# EAGLE board miniCARL-mk2 (EAGLE 6.5.0)
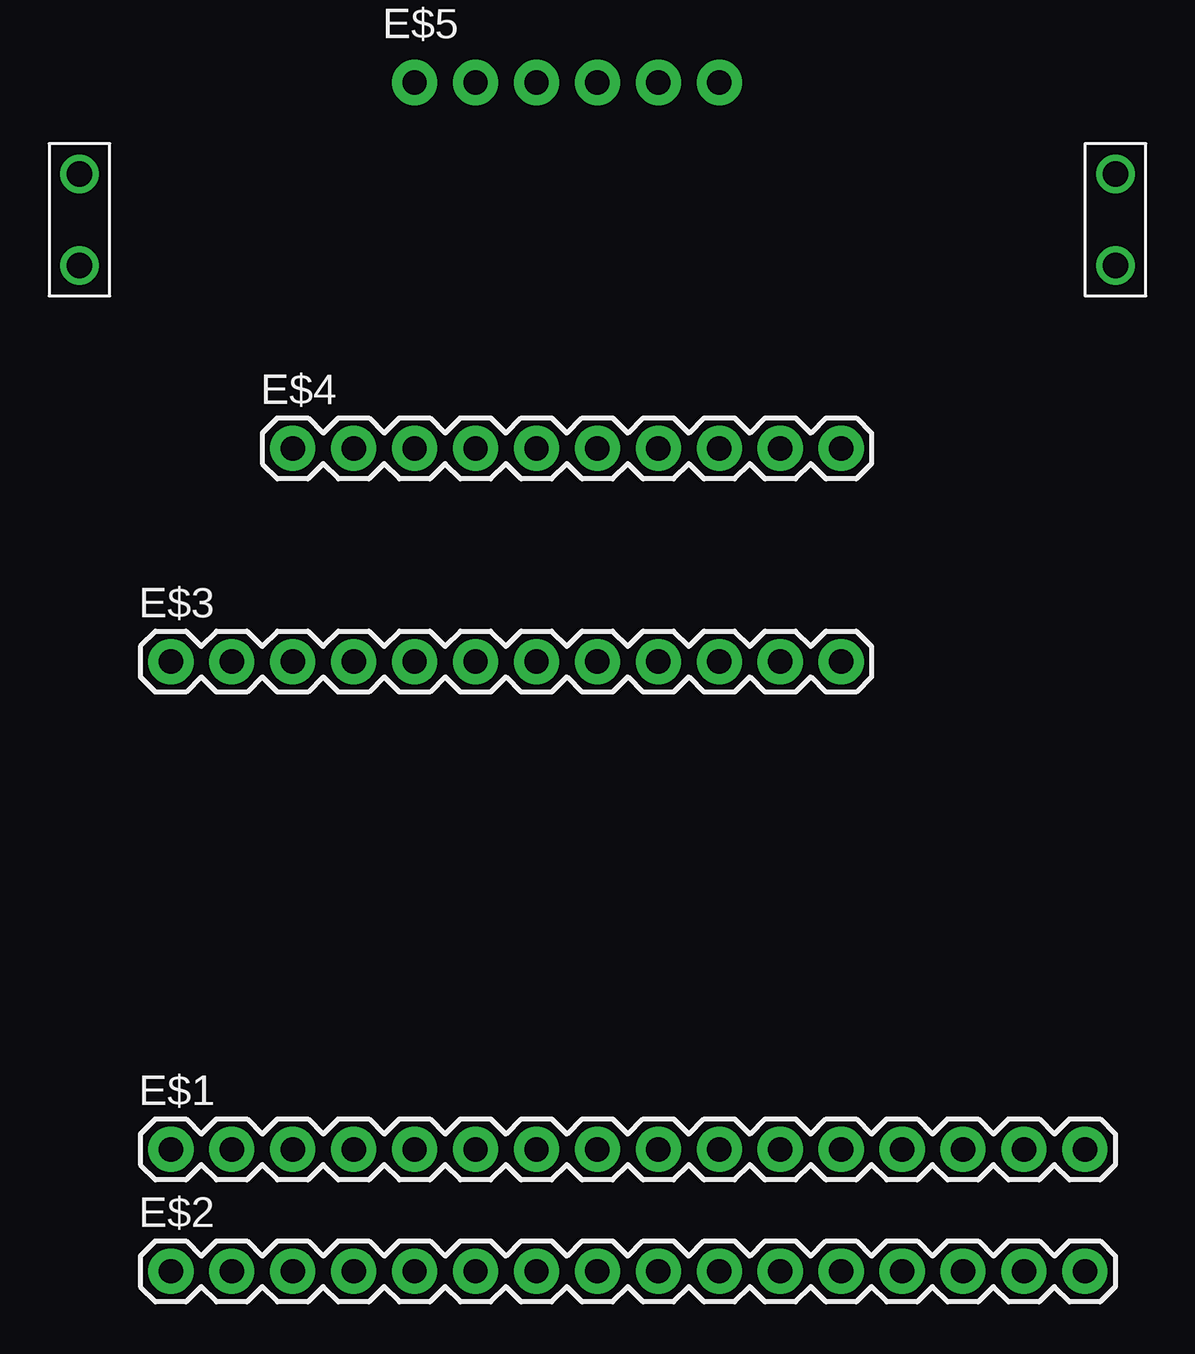
[diagram p0: board, top side]
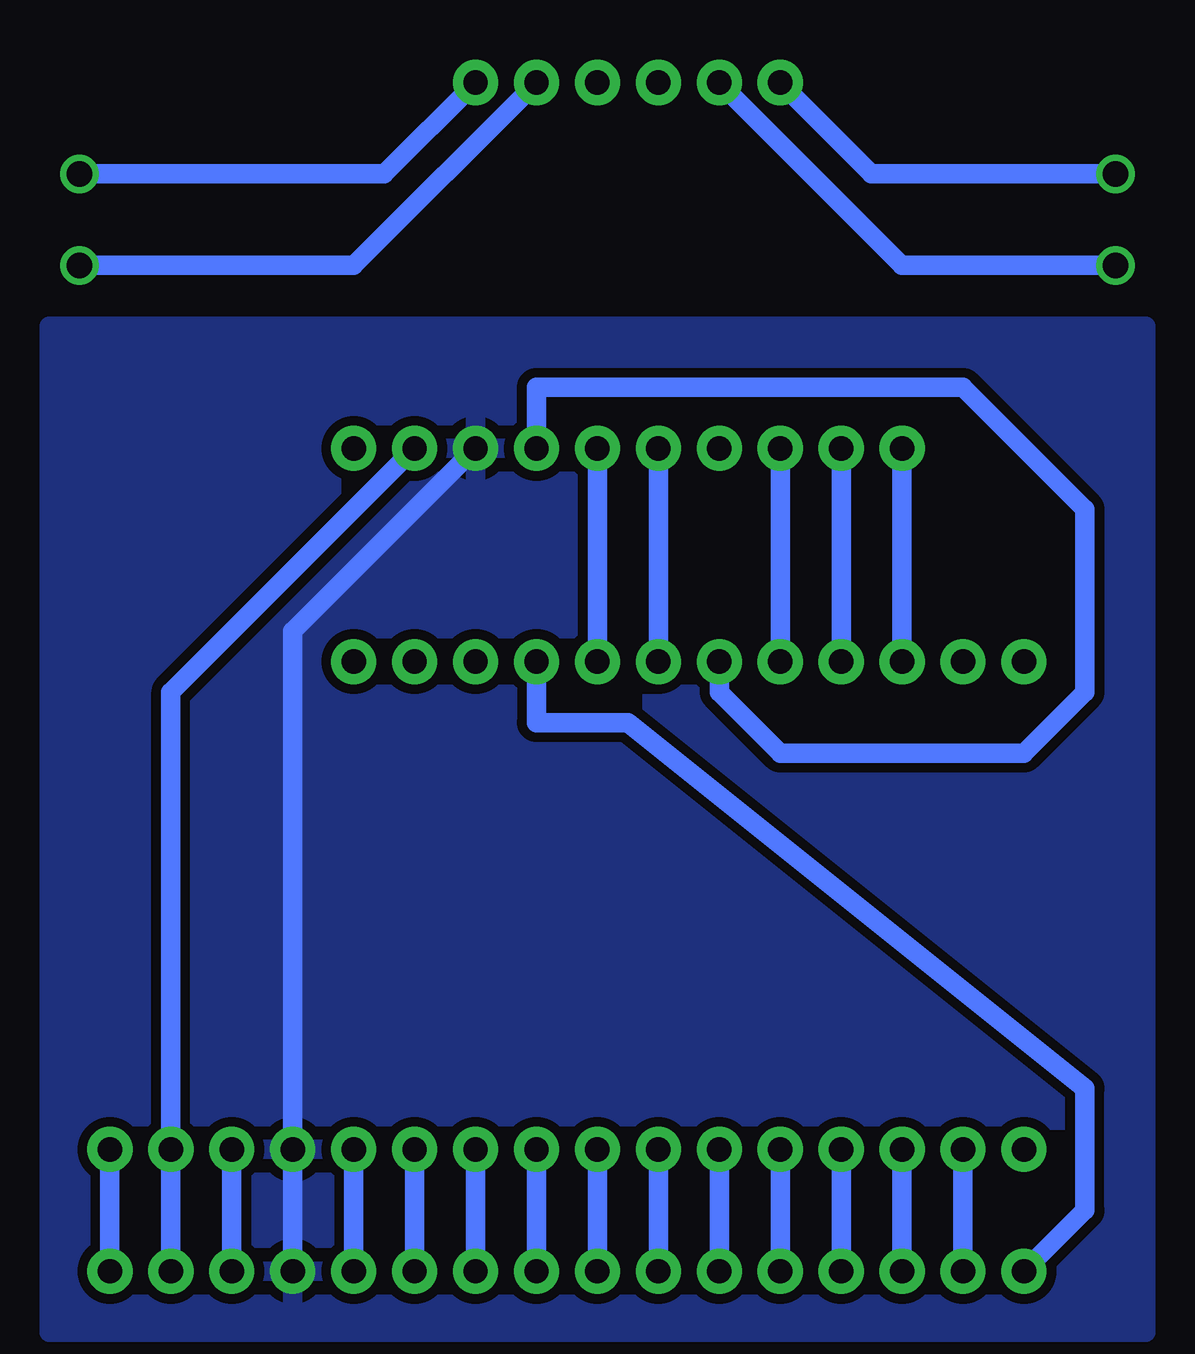
[diagram p1: board, bottom side, seen from below]

No outline drawn. Coordinates in mm, seen from the top.
Copper layers (1*16): Top 0.035mm / dielectric 1.5mm / Bottom 0.035mm
Design rules "default *": minimum track width 16mil, minimum drill 24mil, track to track 16mil, track to pad 16mil, pad to pad 16mil, via to via 16mil, smd to smd 16mil, copper to edge 40mil, drill to drill 16mil, minimum pad ring 10mil, minimum via ring 8mil, stop-mask expansion 4mil, vias tented up to drill 0mil, thermal gap 16mil
Net classes: 0 default: width 0.813 mm
Milling: 8 lines

## Footprints (pad centres in the part's own frame; a part is rotated, then mirrored left to right if it is on the bottom)
1X16 = drill 1.016 pad 1.88: 1 0,0; 2 2.54,0; 3 5.08,0; 4 7.62,0; 5 10.16,0; 6 12.7,0; 7 15.24,0; 8 17.78,0; 9 20.32,0; 10 22.86,0; 11 25.4,0; 12 27.94,0; 13 30.48,0; 14 33.02,0; 15 35.56,0; 16 38.1,0
1X12 = drill 1.016 pad 1.88: 1 0,0; 2 2.54,0; 3 5.08,0; 4 7.62,0; 5 10.16,0; 6 12.7,0; 7 15.24,0; 8 17.78,0; 9 20.32,0; 10 22.86,0; 11 25.4,0; 12 27.94,0
1X10 = drill 1.016 pad 1.88: 1 0,0; 2 2.54,0; 3 5.08,0; 4 7.62,0; 5 10.16,0; 6 12.7,0; 7 15.24,0; 8 17.78,0; 9 20.32,0; 10 22.86,0
1X06 = drill 1.016 pad 1.88: 1 0,0; 2 2.54,0; 3 5.08,0; 4 7.62,0; 5 10.16,0; 6 12.7,0
1X02_BIG = drill 1.067: P$1 0,0; P$2 3.81,0

## Placement (x,y rotation side)
E$1  [1X16]  11.43,13.97 0 top
E$2  [1X16]  11.43,8.89 0 top
E$3  [1X12]  11.43,34.29 0 top
E$4  [1X10]  16.51,43.18 0 top
E$5  [1X06]  21.59,58.42 0 top
E$8  [1X02_BIG]  7.62,50.8 90 top
E$9  [1X02_BIG]  50.8,50.8 90 top

## Library data of the parts
E$1-E$5 E$8 E$9 = SparkFun-Connectors

## Nets
GND: E$1.13 E$2.13 E$4.8
S$1: E$5.1 E$8.P$2
S$2: E$5.2 E$8.P$1
S$3: E$5.6 E$9.P$2
S$4: E$5.5 E$9.P$1
S$5: E$3.3 E$4.1
S$6: E$3.4 E$4.2
S$7: E$3.5 E$4.3
S$8: E$3.8 E$4.6
S$9: E$3.7 E$4.5
S$10: E$3.6 E$4.7
S$11: E$1.15 E$2.15 E$4.9
S$13: E$1.16 E$2.16
S$14: E$1.14 E$2.14
S$15: E$1.12 E$2.12
S$16: E$1.11 E$2.11
S$17: E$1.10 E$2.10
S$18: E$1.9 E$2.9
S$19: E$1.8 E$2.8
S$20: E$1.7 E$2.7
S$21: E$1.6 E$2.6
S$22: E$1.5 E$2.5
S$23: E$1.4 E$2.4
S$24: E$1.3 E$2.3
S$25: E$1.2 E$2.2
S$26: E$2.1 E$3.9

## Tracks (layer width: path | path; a pad name or v marks a point on that pad's centre or on a via)
GND
  Bottom 0.813: E$2.13 E$1.13 41.91,35.56 E$4.8
  pour Bottom: 6.35,48.26 52.07,48.26 52.07,6.35 6.35,6.35
S$1
  Bottom 0.813: E$8.P$2 17.78,54.61 E$5.1
S$2
  Bottom 0.813: E$5.2 16.51,50.8 E$8.P$1
S$3
  Bottom 0.813: E$5.6 38.1,54.61 E$9.P$2
S$4
  Bottom 0.813: E$5.5 39.37,50.8 E$9.P$1
S$5
  Bottom 0.813: E$4.1 E$3.3
S$6
  Bottom 0.813: E$4.2 E$3.4
S$7
  Bottom 0.813: E$4.3 E$3.5
S$8
  Bottom 0.813: E$3.8 E$4.6
S$9
  Bottom 0.813: E$4.5 E$3.7
S$10
  Bottom 0.813: E$4.7 31.75,45.72 13.97,45.72 8.89,40.64 8.89,33.02 11.43,30.48 21.59,30.48 24.13,33.02 E$3.6
S$11
  Bottom 0.813: E$2.15 E$1.15 46.99,33.02 E$4.9
S$13
  Bottom 0.813: E$1.16 E$2.16
S$14
  Bottom 0.813: E$1.14 E$2.14
S$15
  Bottom 0.813: E$1.12 E$2.12
S$16
  Bottom 0.813: E$1.11 E$2.11
S$17
  Bottom 0.813: E$1.10 E$2.10
S$18
  Bottom 0.813: E$1.9 E$2.9
S$19
  Bottom 0.813: E$1.8 E$2.8
S$20
  Bottom 0.813: E$1.7 E$2.7
S$21
  Bottom 0.813: E$1.6 E$2.6
S$22
  Bottom 0.813: E$1.5 E$2.5
S$23
  Bottom 0.813: E$1.4 E$2.4
S$24
  Bottom 0.813: E$1.3 E$2.3
S$25
  Bottom 0.813: E$1.2 E$2.2
S$26
  Bottom 0.813: E$2.1 8.89,11.43 8.89,16.51 27.94,31.75 31.75,31.75 E$3.9